# Altium PCB PCB_Byb2a.PcbDoc
Units mm, origin at the board's own origin, x right, y up, seen from the top; angles counter-clockwise.
Board outline 150 x 100.13 mm, 2 copper layers (Top Layer, Bottom Layer), stack 1.671 mm thick; 73 components, 29 nets, 138 pads, 21 vias.
Unrouted connection lines stored in the file: 5.
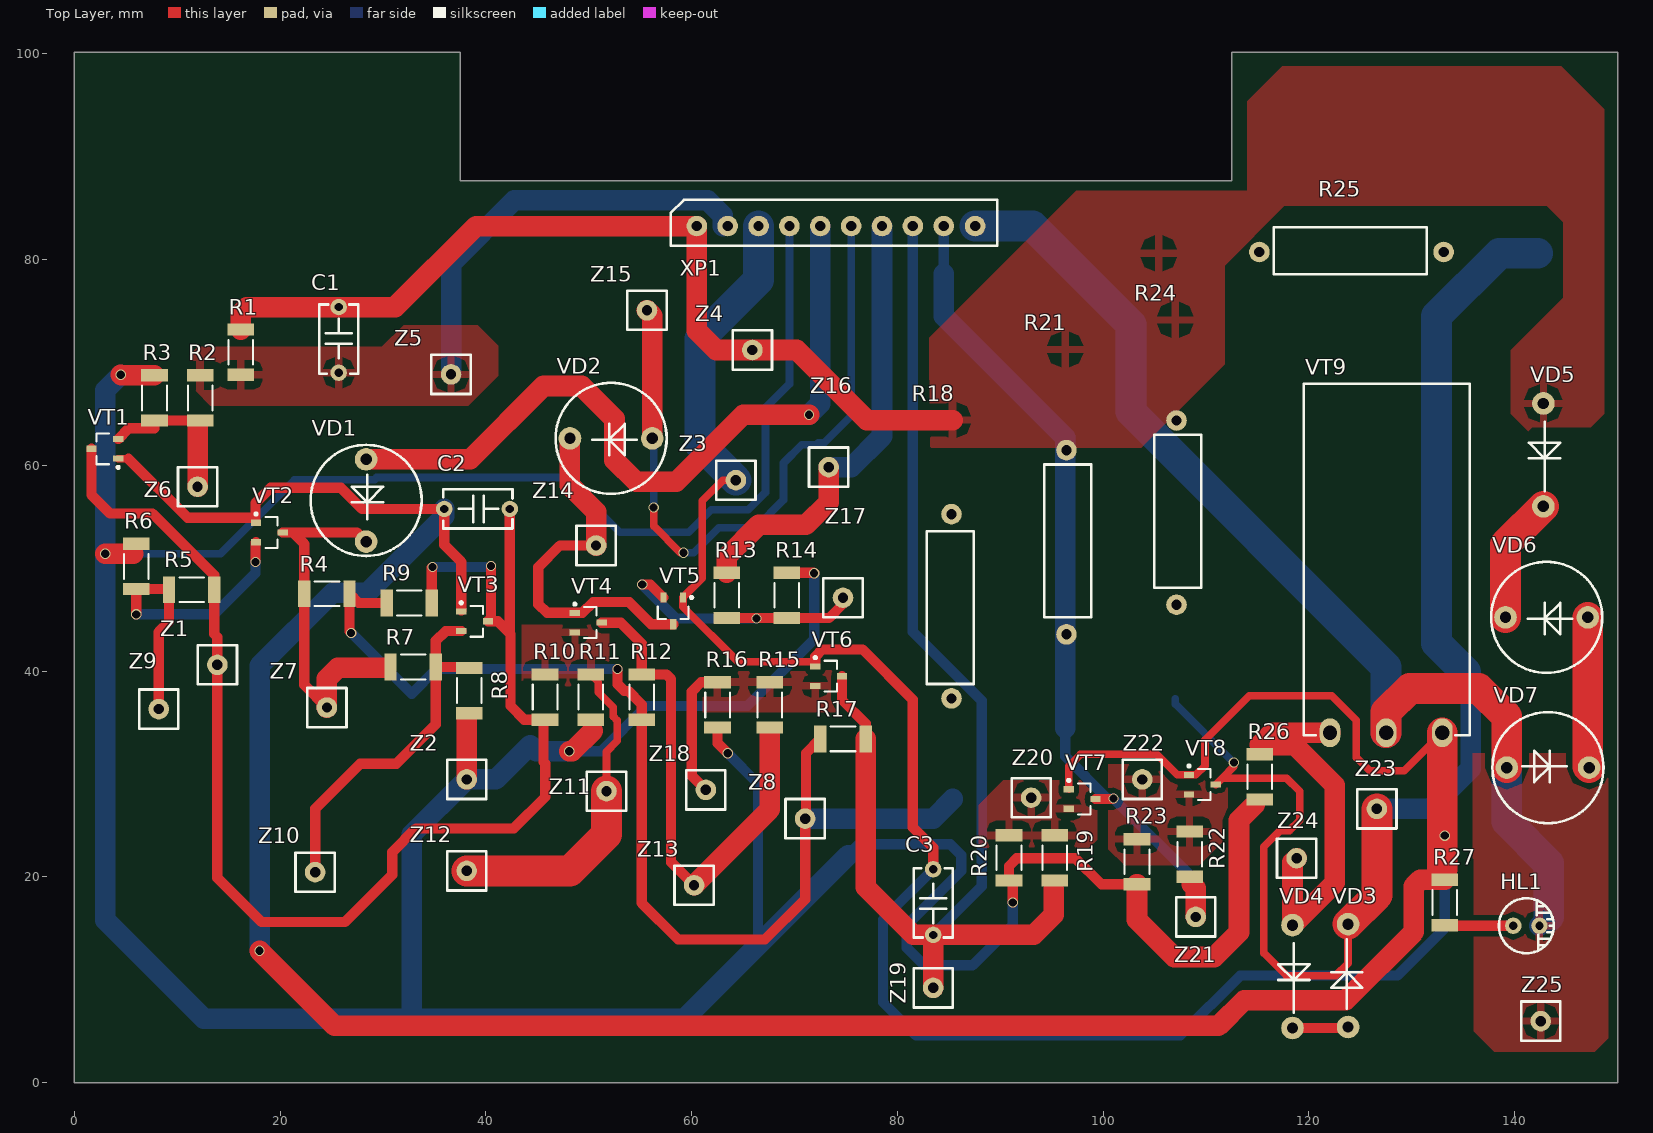
[diagram p0: Top Layer view]
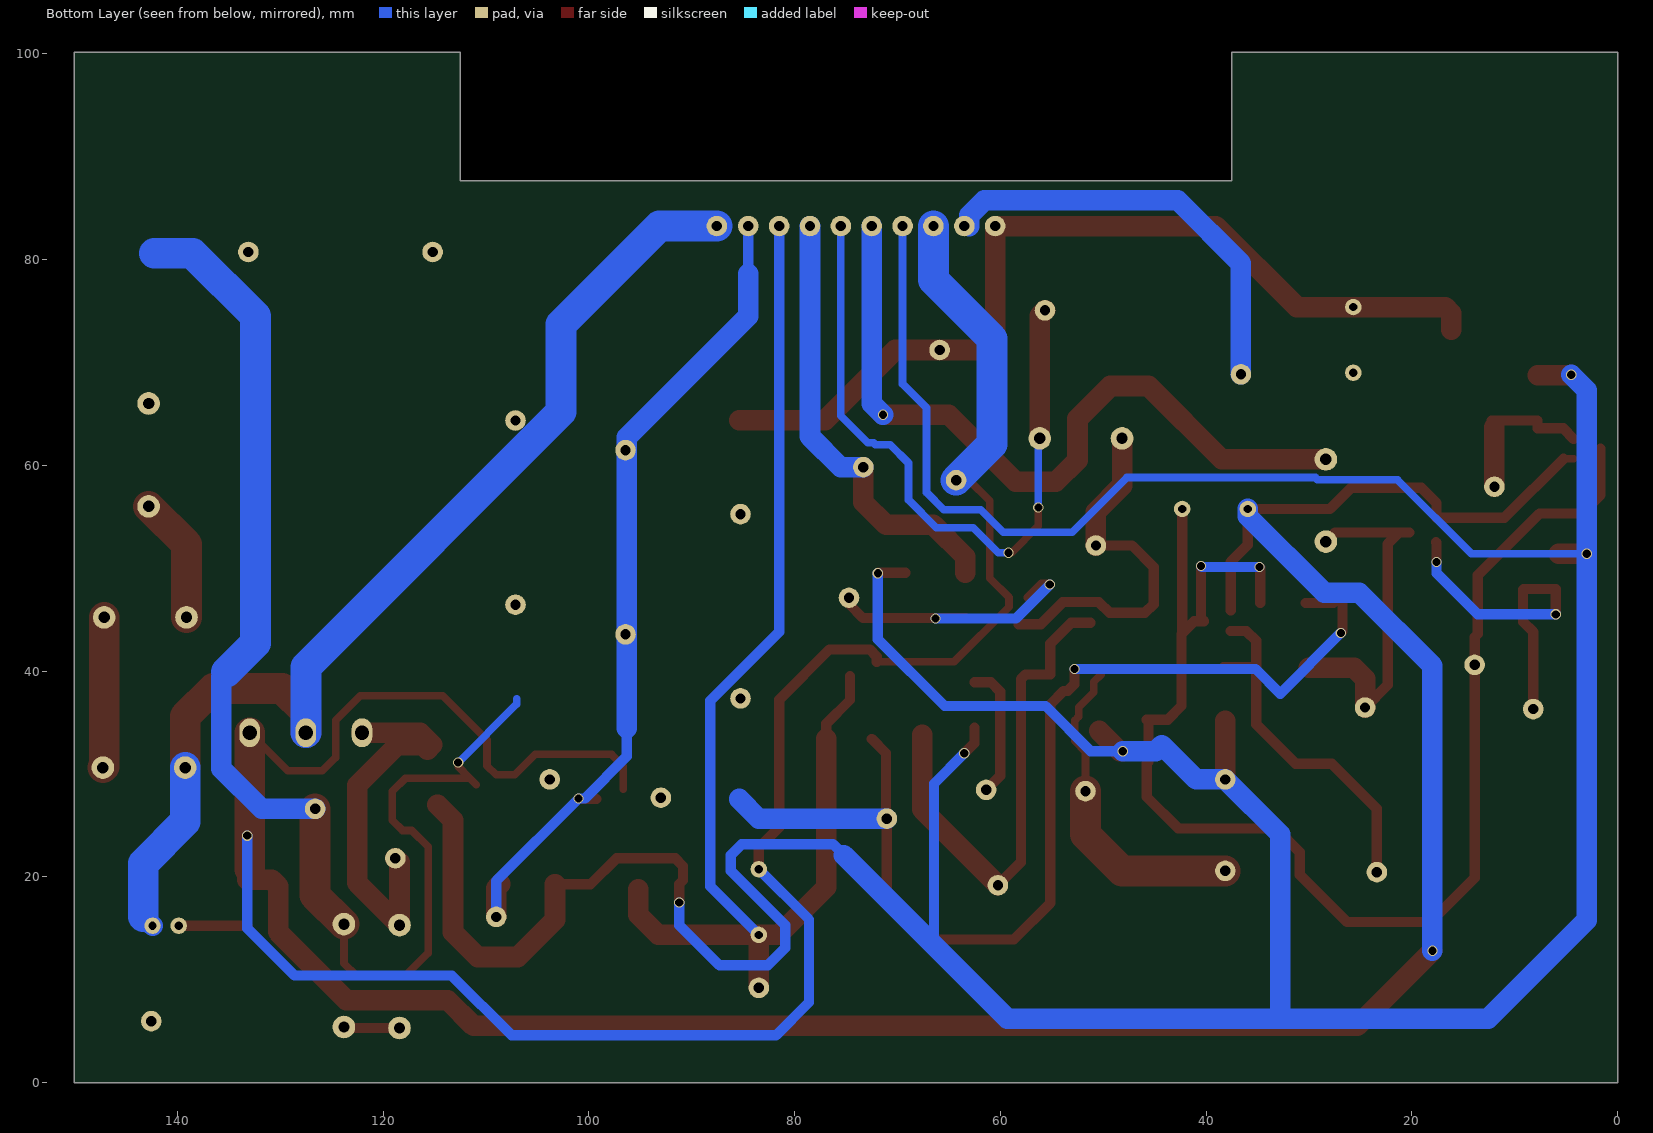
[diagram p1: Bottom Layer view, seen from below]
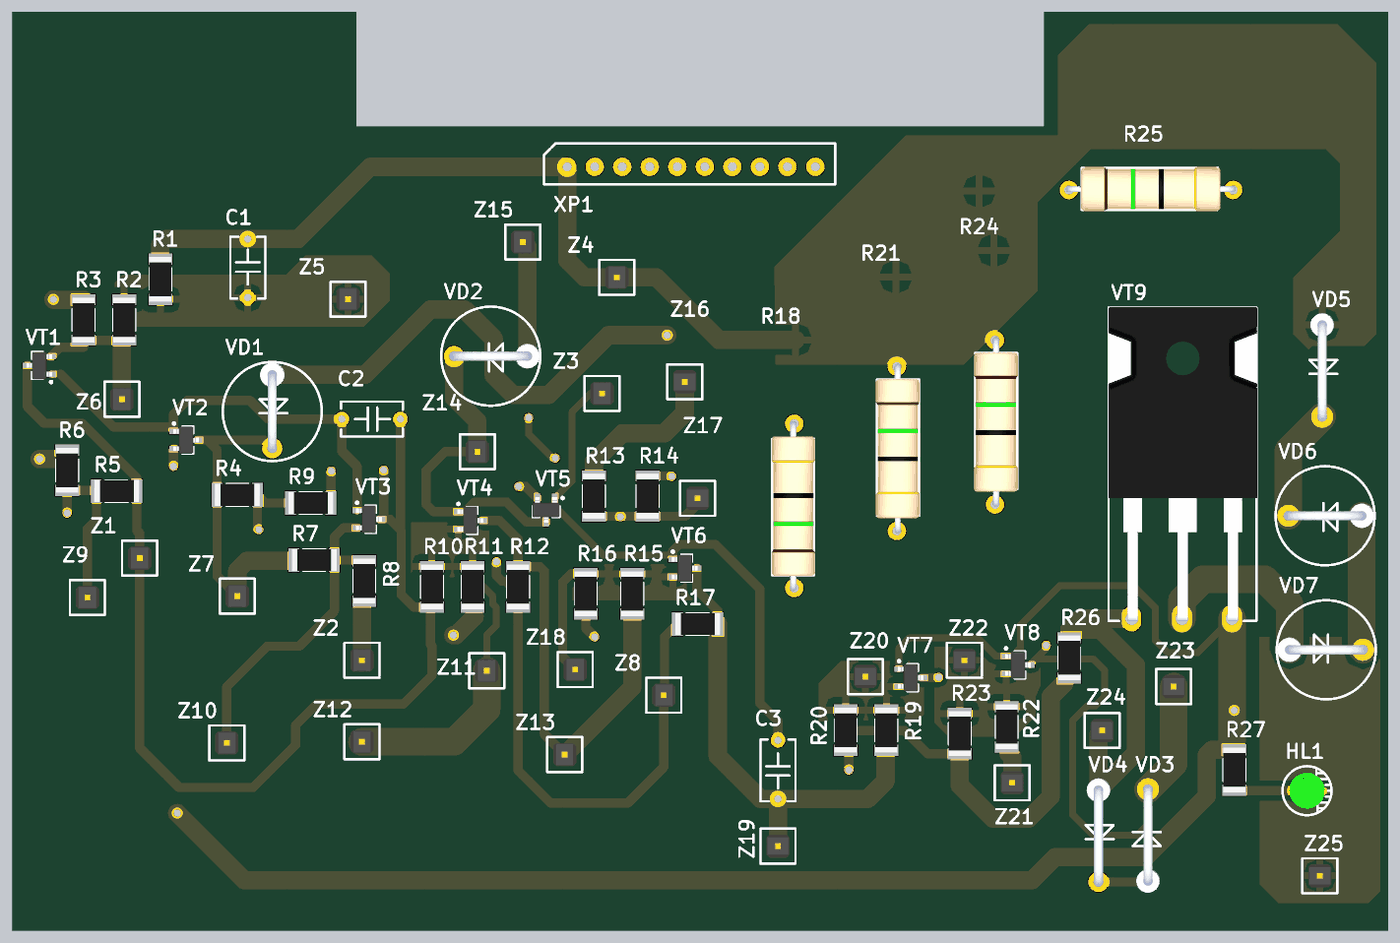
[diagram p2: 3D render of the assembled board from above, using the file's embedded part models]

## Layer stack, top to bottom
Top Solder: solder mask 0.0102, Solder Resist, Dk 3.5
Top Layer: signal copper 0.0356
Dielectric 1: dielectric 1.6, FR-4, Dk 4.8
Bottom Layer: signal copper 0.0356
Bottom Solder: solder mask 0.0102, Solder Resist, Dk 3.5

## Board outline
0,0 0,100.13 37.5,100.13 37.5,87.63 112.5,87.63 112.5,100.13 150,100.13 150,0

## Design rules (kind name [scope] priority, off if disabled: settings)
Clearance [All] p1: gap=0.5 ignorepadtopadclearanceinfootprint=FALSE except(1: Arc-Arc Arc-Track Track-Track)
PlaneClearance [All] p1: clearance=1
PlaneConnect [All] p1: planeconnectstyle=Relief reliefexpansion=0.75 reliefentries=4 reliefconductorwidth=0.75 reliefairgap=0.75
PolygonConnect [All] p1: connectstyle=Relief reliefconductorwidth=0.75 reliefentries=4 polygonreliefangle="90 Angle" airgapwidth=0.75
RoutingVias [All] p1: holewidth=0.8 width=1 viastyle="Through Hole" minholewidth=0.8 minwidth=1 maxholewidth=0.8 maxwidth=1
SolderMaskExpansion [All] p1: expansion=0.102
Width [All] p1: maxlimit=4 minlimit=0.75 preferedwidth=3
28 further rules are at their usual default settings.

## Components (designator, comment, footprint, x,y, rotation, side; value= is the part's Value field where it differs from the comment)
C1 "Capasitor" CAPASITOR 25.689,75.373 r270 top value=0.25uF
C2 "Capasitor" CAPASITOR 42.326,55.753 r180 top value=0.25uF
C3 "Capasitor" CAPASITOR 83.474,14.351 r90 top value=0.25uF
HL1 "Led" GNLR 139.862,15.24 r0 top
R1 "Resistor_1/2W" RESC5025L 16.164,70.993 r90 top value=470
R2 "Resistor_1/2W" RESC5025L 12.227,66.548 r90 top value=1k2
R3 "Resistor_1/2W" RESC5025L 7.782,66.548 r270 top value=680
R4 "Resistor_1/2W" RESC5025L 24.546,47.498 r0 top value=820
R5 "Resistor_1/2W" RESC5025L 11.4,47.9 r0 top value=820
R6 "Resistor_1/2W" RESC5025L 6.004,50.165 r270 top value=3k9
R7 "Resistor_1/2W" RESC5025L 32.928,40.386 r180 top value=820
R8 "Resistor_1/2W" RESC5025L 38.389,38.1 r90 top value=3k9
R9 "Resistor_1/2W" RESC5025L 32.547,46.609 r180 top value=820
R10 "Resistor_1/2W" RESC5025L 45.755,37.465 r270 top value=820
R11 "Resistor_1/2W" RESC5025L 50.2,37.465 r90 top value=3k9
R12 "Resistor_1/2W" RESC5025L 55.153,37.465 r270 top value=820
R13 "Resistor_1/2W" RESC5025L 63.408,47.355 r90 top value=820
R14 "Resistor_1/2W" RESC5025L 69.25,47.355 r270 top value=3k9
R15 "Resistor_1/2W" RESC5025L 67.599,36.703 r270 top value=820
R16 "Resistor_1/2W" RESC5025L 62.519,36.703 r90 top value=3k9
R17 "Resistor_1/2W" RESC5025L 74.711,33.401 r180 top value=820
R18 "Resistor_1/2W" RESISTOR_2W 85.379,64.389 r270 top value=220
R19 "Resistor_1/2W" RESC5025L 95.285,21.844 r270 top value=560
R20 "Resistor_1/2W" RESC5025L 90.84,21.844 r90 top value=3k3
R21 "Resistor_1/2W" RESISTOR_2W 96.301,34.417 r90 top value=560
R22 "Resistor_1/2W" RESC5025L 108.4,22.2 r270 top value=560
R23 "Resistor_1/2W" RESC5025L 103.286,21.463 r90 top value=3k3
R24 "Resistor_1/2W" RESISTOR_2W 107,37.3 r90 top value=560
R25 "Resistor_1/2W" RESISTOR_2W 142.23,80.6 r180 top value=560
R26 "Resistor_1/2W" RESC5025L 115.224,29.718 r90 top value=560
R27 "Resistor_1/2W" RESC5025L 133.2,17.5 r270 top value=3k3
VD1 "Diode" DO-41-VERTICAL 28.356,60.579 r270 top
VD2 "Diode" DO-41-VERTICAL 56.168,62.611 r180 top
VD3 "Diode" DO-15-VERTICAL 123.8,5.4 r90 top
VD4 "Diode" DO-15-VERTICAL 118.4,15.3 r270 top
VD5 "Diode" DO-15-VERTICAL 142.783,66.007 r270 top
VD6 "stabilizater" DO-41-VERTICAL 147.101,45.212 r180 top
VD7 "stabilizater" DO-41-VERTICAL 139.227,30.607 r0 top
VT1 "Bipolar Transistor" SOT95P270X110-3N 2.956,61.595 r180 top
VT2 "Bipolar Transistor" SOT95P270X110-3N 18.958,53.467 r0 top
VT3 "Bipolar Transistor" SOT95P270X110-3N 38.897,44.831 r0 top
VT4 "Bipolar Transistor" SOT95P270X110-3N 49.946,44.704 r0 top
VT5 "Bipolar Transistor" SOT95P270X110-3N 58.201,45.847 r270 top
VT6 "Bipolar Transistor" SOT95P270X110-3N 73.314,39.497 r0 top
VT7 "Bipolar Transistor" SOT95P270X110-3N 97.952,27.559 r0 top
VT8 "Bipolar Transistor" SOT95P270X110-3N 109.636,28.956 r0 top
VT9 "2sb688" TO-247-3 122.04,34 r0 top
XP1 "Connector" CONNECTOR 60.5,83.25 r0 top
Z1 "point_control" POINT_CONTROL 13.9,40.6 r0 top
Z2 "point_control" POINT_CONTROL 38.135,29.464 r0 top
Z3 "point_control" POINT_CONTROL 64.297,58.547 r0 top
Z4 "point_control" POINT_CONTROL 65.9,71.2 r0 top
Z5 "point_control" POINT_CONTROL 36.611,68.834 r0 top
Z6 "point_control" POINT_CONTROL 11.973,57.912 r180 top
Z7 "point_control" POINT_CONTROL 24.546,36.449 r0 top
Z8 "point_control" POINT_CONTROL 71.028,25.654 r0 top
Z9 "point_control" POINT_CONTROL 8.2,36.3 r0 top
Z10 "point_control" POINT_CONTROL 23.403,20.447 r0 top
Z11 "point_control" POINT_CONTROL 51.724,28.321 r0 top
Z12 "point_control" POINT_CONTROL 38.135,20.574 r0 top
Z13 "point_control" POINT_CONTROL 60.233,19.177 r0 top
Z14 "point_control" POINT_CONTROL 50.708,52.197 r180 top
Z15 "point_control" POINT_CONTROL 55.661,75.057 r0 top
Z16 "point_control" POINT_CONTROL 73.314,59.817 r90 top
Z17 "point_control" POINT_CONTROL 74.711,47.117 r90 top
Z18 "point_control" POINT_CONTROL 61.376,28.448 r0 top
Z19 "point_control" POINT_CONTROL 83.474,9.2 r90 top
Z20 "point_control" POINT_CONTROL 92.999,27.686 r90 top
Z21 "point_control" POINT_CONTROL 109,16.1 r90 top
Z22 "point_control" POINT_CONTROL 103.794,29.464 r90 top
Z23 "point_control" POINT_CONTROL 126.6,26.6 r90 top
Z24 "point_control" POINT_CONTROL 118.8,21.8 r90 top
Z25 "point_control" POINT_CONTROL 142.529,5.969 r90 top

## Footprints (in the part's own frame and the unit in brackets; to place one, negate y for a bottom-side part, rotate by r counter-clockwise, add the part's x,y. Pads: shape width x height; smd on the part's side, far side on the other; paste and mask are expansions set on the pad)
CAPASITOR [mm]
  round 1.6 hole 0.8: 1(0,0) 2(6.38,0)
  silkscreen extent -0.25,-1.91 6.48,1.91, body extent -0.32,-2.93 6.58,2.98, height 7.17
CONNECTOR [mm]
  round 2 hole 1: 1(0,0) 2(3,0) 3(6,0) 4(9,0) 5(12,0) 6(15,0) 7(18,0) 8(21,0) 9(24,0) 10(27.051,0)
  silkscreen extent -2.54,-1.91 29.21,2.54
DO-15-VERTICAL [mm]
  round 2.2 hole 1.1: 1(0,0) 2(10,0)
  silkscreen extent 1.78,-1.4 8.51,1.65, body extent -1.3,-1.3 10.5,1.3, height 8.38
DO-41-VERTICAL [mm]
  round 2.2 hole 1.1: 1(0,0) 2(8,0)
  silkscreen extent -1.4,-5.4 9.4,5.4, body extent -1.35,-1.35 8.5,1.35, height 12.1
GNLR [mm]
  round 1.6 hole 0.8: 1(0,0) 2(2.54,0)
  silkscreen extent -1.4,-2.67 3.94,2.67, body extent -0.68,-1.95 3.22,1.95, height 8
POINT_CONTROL [mm]
  round 2 hole 1: 1(0,0)
  silkscreen extent -1.91,-1.91 1.91,1.91, body extent -1.27,-1.27 1.27,1.27, height 10
RESC5025L [mm] "Chip Resistor, Body 5.0x2.5mm, IPC High Density"
  rect 1.2x2.6 smd: 1(-2.2,0) 2(2.2,0)
  silkscreen extent -1.2,-1.2 1.2,1.2, body extent -2.45,-1.2 2.45,1.2, height 0.55
RESISTOR_2W [mm]
  round 2 hole 1: 1(9.144,-0.127) 2(27.051,-0.127)
  silkscreen extent 10.79,-2.54 25.65,2.03, body extent 8.89,-2.62 27.38,2.16, height 5.02
SOT95P270X110-3N [mm] "SOT23, 3-Leads, Body 2,95x2,70mm, Pitch 0,95mm, IPC Medium Density"
  rect 1x0.6 smd: 1(-1.3,0.95) 2(-1.3,-0.95) 3(1.3,0)
  silkscreen extent -1.43,-1.5 0.8,1.92, body extent -1.4,-1.5 1.4,1.5, height 1.1
TO-247-3 [mm]
  oval 2x2.8 hole 1.4: 1(0,0) 2(5.46,0) 3(10.92,0)
  silkscreen extent -2.54,-0.25 13.59,33.91, body extent -2.54,-0.25 13.66,33.95, height 5.5

## Part data
C2 C3: Voltage=160B, Marka=ELM
HL1: Color=Green, Marka=АЛ-203
R1 R18 R21 R24 R25: package=5020, Power=2W
  R1: Marka=RES2010
  R18 R21 R24 R25: Marka=R2010
R2 R3: Power=0.5W
R4 R5 R6 R7 R8 R9 R10 R11 R12: package=2010, Power=0.5W
  R4: Marka=R5025
  R5 R7: Marka=R5020
  R6: Marka=RE5020
  R8 R9 R10 R11 R12: Marka=RES5020
R13 R14 R15 R16 R17 R19 R20 R22 R23 R26 R27: package=5020, Power=0.5W, Marka=R2010
VD1 VD2 VD6 VD7: package=DO-41
  VD1 VD2: Marka=HER105
  VD6 VD7: Marka=BZx85
VD3 VD4 VD5: package=DO-15, Marka=SF-28
VT1: package=SoT-323, Marka=2SB1198
VT2 VT3: package=SOT-323, Marka=2SB1198
VT4 VT6 VT7 VT8: package=Sot-323, Marka=2SB1198
VT5: package=sot-323, Marka=2SB1198
VT9: package=TO-247, Marka=2SB688
C1: Marka=EMN1223

## Via types
v1: diameter 1, hole 0.8, Top Layer to Bottom Layer, 21 vias

## Nets (pads, with @x,y where several pads share a name; then routed paths per layer and width w, separated by ;. In a path a pad name is that pad's centre, name@x,y a point inside that pad or via, vN(x,y) a via of type N, cw(c..) or ccw(c..) an arc to the next point about the centre after c; other vN are vias at no path point)
20: C2.2 C3.2 R27.1 VT1.1 VT2.1 VT3.1 VT5.1 VT6.1 VT7.1 VT8.1 VT9.3 XP1.3 Z3.1 | length 463.5
  Top Layer w0.75: VT1.1 5.255,60.645 ; Z3.1 63.047,58.547 61.033,56.533 61.033,49.029 VT5.1 59.151,46.249 64.5,40.9 72,40.9 ; VT7.1 96.652,30.752 97.8,31.9 105.212,31.9 107.206,29.906 VT8.1 109.006,29.906 109.9,30.8 109.9,33.3 114.2,37.6 122.2,37.6 124.6,35.2 124.6,31.6 125.9,30.3 129.26,30.3 VT9.3
  Top Layer w1: 5.255,60.645 11,54.9 17.6,54.9 17.6,56.3 19.1,57.8 25.9,57.8 27.947,55.753 C2.2 35.946,52.254 37.597,50.603 VT3.1@37.597,45.881 ; 72,40.9 72,41.4 72.7,42.1 76.6,42.1 81.5,37.2 81.5,24.8 83.474,22.826 C3.2
  Top Layer w2: v1(18,12.8) 25.3,5.5 111.2,5.5 113.7,8 123.559,8 130.2,14.641 130.2,19.1 130.8,19.7 R27.1
  Top Layer w3: 132.96,20.74 VT9.3
  Bottom Layer w1: C3.2 78.6,15.857 78.6,7.8 81.8,4.6 107.5,4.6 113.3,10.4 128.6,10.4 133.2,15 v1(133.2,24)
  Bottom Layer w2: v1(18,12.8) 18,40.5 25.1,47.6 28.5,47.6 35.946,55.046 C2.2
  Bottom Layer w3: Z3.1 60.8,62.044 60.8,72.3 66.5,78 XP1.3
29: C1.2 R1.1 R2.2 XP1.2 Z5.1 | length 41.4
  Bottom Layer w2: Z5.1 36.611,79.611 42.75,85.75 61.536,85.75 63,84.286 XP1.2@63,83.25
30: C1.1 R1.2 R18.1 R21.2 R24.2 R25.2 VD5.1 XP1.1 Z4.1 | length 88.1
  Top Layer w2: R1.2 16.164,74.764 16.773,75.373 C1.1 31.173,75.373 39.05,83.25 XP1.1 60.5,73.1 62.4,71.2 Z4.1 70.2,71.2 77.011,64.389 85.379,64.389
40: R4.2 R9.2 R12.2 R17.2 R18.2 Z8.1 | length 111.4
  Top Layer w1: v1(26.9,43.7) 26.746,43.854 R4.2 27.635,46.609 R9.2 ; v1(52.8,40.2) 52.8,38.704 53.439,38.065 53.835,38.065 55.153,36.747 R12.2 55.153,17.447 58.7,13.9 67.1,13.9 71.028,17.828 Z8.1 71.11,25.736 71.11,32 R17.2
  Bottom Layer w1: v1(26.9,43.7) 32.8,37.8 35.2,40.2 v1(52.8,40.2)
  Bottom Layer w2: Z8.1 83.474,25.654 85.379,27.559
45: R2.1 R3.2 VT1.2 Z6.1 | length 14.9
  Top Layer w1: VT1.2 5.293,63.582 7.782,63.582 R3.2 R2.1
  Top Layer w2: Z6.1 11.973,63.673
46: R5.1 R6.2 VT2.2 Z9.1 | length 34
  Top Layer w1: v1(6.004,45.504) R6.2 9.135,47.965 R5.1 9.2,44.8 8.2,43.8 Z9.1 ; v1(17.6,50.6) 17.6,52.459 VT2.2
  Bottom Layer w1: v1(6.004,45.504) 13.604,45.504 17.6,49.5 v1(17.6,50.6)
47: R4.1 R7.2 VD1.2 VT2.3 Z7.1 | length 35.5
  Top Layer w1: VT2.3 21.233,53.467 ; Z7.1 22.346,38.649 R4.1 22.346,52.354 21.233,53.467 ; VD1.2 27.468,53.467 21.233,53.467
  Top Layer w2: Z7.1 24.546,39.246 25.6,40.3 30,40.3
48: R7.1 R8.2 VT3.2 Z10.1 | length 35.5
  Top Layer w1: Z10.1 23.403,26.603 27.8,31 31.3,31 35.128,34.828 R7.1 ; VT3.2 36.081,43.881 35.128,42.928 R7.1 ; R8.2 38.303,40.386 R7.1
50: C2.1 R5.2 R9.1 R10.2 VT1.3 VT3.3 Z1.1 | length 137.2
  Top Layer w1: VT1.3 1.656,57.144 3.5,55.3 7.6,55.3 13.6,49.3 R5.2 13.6,43.6 13.9,43.3 Z1.1 13.9,19.9 18.2,15.6 26.3,15.6 30.9,20.2 30.9,22.4 33.2,24.7 42.7,24.7 45.755,27.755 45.755,31.009 45.6,31.164 45.6,35.11 R10.2 43.735,35.265 42.4,36.6 42.4,43.6 42.326,43.674 ; R9.1 34.747,50.047 v1(34.8,50.1) ; v1(40.5,50.2) 40.5,45.134 VT3.3 41.169,44.831 42.326,43.674 ; C2.1 42.326,43.674
  Bottom Layer w1: v1(34.8,50.1) 40.4,50.1 v1(40.5,50.2)
51: R10.1 R11.2 VT4.2 Z11.1 Z12.1 | length 32.1
  Top Layer w0.75: R11.2 50.925,38.94 50.925,37.927 52.375,36.477 52.375,35.584 52.775,35.184 52.775,33.216 51.724,32.165 Z11.1
  Top Layer w3: Z12.1 48.174,20.574 51.724,24.124 Z11.1
52: VD2.2 VT4.1 VT5.3 Z14.1 | length 36.3
  Top Layer w1: Z14.1 47.197,52.197 45.1,50.1 45.1,46.5 45.946,45.654 VT4.1 49.368,45.654 50.418,46.704 53.924,46.704 56.081,44.547 VT5.3
  Top Layer w2: VD2.2 48.168,58.032 50.708,55.492 Z14.1
53: R12.1 R15.2 VT4.3 Z13.1 | length 49.4
  Top Layer w1: VT4.3 53.096,44.704 55.153,42.647 R12.1 57.535,39.665 58,39.2 58,21.41 Z13.1
  Top Layer w2: Z13.1 67.6,26.544 67.6,33.8
56: R15.1 R16.2 VT6.2 Z18.1 | length 13
  Top Layer w1: Z18.1 60,29.824 60,38 60.903,38.903 R16.2
57: C3.1 R17.1 R19.2 VT6.3 XP1.8 Z19.1 | length 123.8
  Top Layer w1: VT6.3 74.614,37.186 76.911,34.889 R17.1
  Top Layer w2: R17.1 76.911,18.989 81.549,14.351 C3.1 ; Z19.1 C3.1 ; 95.2,18.8 95.2,16.3 93.251,14.351 C3.1
  Bottom Layer w1: XP1.8 81.5,43.8 88.2,37.1 88.2,19.077 C3.1
58: R19.1 R20.2 VT7.2 Z20.1
59: R21.1 R22.2 VT7.3 XP1.9 Z21.1 | length 82.8
  Top Layer w1: VT7.3 100.959,27.559 v1(101,27.6)
  Top Layer w2: 108.6,19.3 109,18.9 Z21.1
  Bottom Layer w1: 84.5,78.6 XP1.9 ; 96.301,34.417 96.301,31.699 100.4,27.6 v1(101,27.6) 109,19.6 Z21.1
  Bottom Layer w2: 84.5,78.6 84.5,74.5 96.301,62.699 96.301,34.417
60: R3.1 R6.1 R8.1 R11.1 R14.1 R16.1 R20.1 R23.1 R26.1 XP1.4 Z2.1 | length 430.7
  Top Layer w1: R16.1 62.519,32.981 v1(63.5,32) ; R14.1 71.845,49.555 v1(71.9,49.5) ; v1(91.2,17.5) 91.2,19.284 R20.1 90.84,21.04 91.6,21.8 97.3,21.8 99.837,19.263 R23.1
  Top Layer w2: v1(3,51.4) 5.7,51.4 ; v1(4.5,68.8) 4.552,68.748 R3.1 ; Z2.1 38.135,35.165 ; v1(48.1,32.2) 48.4,32.2 50.4,34.2 ; R23.1 103.286,15.814 106.9,12.2 110.8,12.2 113.2,14.6 113.2,25.494 R26.1@114.703,26.997
  Bottom Layer w0.75: v1(3,51.4) 14.2,51.4 21.404,58.604 29.174,58.604 29.37,58.8 47.7,58.8 53,53.5 59.725,53.5 61.897,55.672 65.488,55.672 67.172,57.356 67.172,65.572 69.5,67.9 XP1.4
  Bottom Layer w1: v1(48.1,32.2) 51.2,32.2 55.6,36.6 65.4,36.6 71.9,43.1 v1(71.9,49.5) ; v1(63.5,32) 66.45,29.05 66.45,13.35 ; 75.2,22.1 76.254,23.154 85.146,23.154 86.2,22.1 86.2,20.6 80.9,15.3 80.9,13.1 82.6,11.4 87.3,11.4 91.2,15.3 v1(91.2,17.5)
  Bottom Layer w2: v1(4.5,68.8) 3,67.3 v1(3,51.4) 3,15.8 12.6,6.2 33.1,6.2 ; v1(48.1,32.2) 44.9,32.2 44.3,32.8 40.964,29.464 Z2.1 32.8,24.129 32.8,6.5 33.1,6.2 ; 75.2,22.1 66.45,13.35 59.3,6.2 33.1,6.2
61: R22.1 R23.2 VT8.2 Z22.1
62: R24.1 R25.1 VD3.2 VT8.3 Z23.1 | length 131.4
  Top Layer w0.75: VT8.3 111.562,29.582 ; v1(112.7,31.1) 112.7,30.72 111.562,29.582 ; VD3.2 123.8,11.6 122.575,10.375 117.825,10.375 115.6,12.6 115.6,22.9 117.2,24.5 118.1,24.5 119.1,25.5 119.1,28.3 117.818,29.582 111.562,29.582
  Top Layer w3: VD3.2 126.6,18.2 Z23.1
  Bottom Layer w0.75: 107,37.3 107,36.8 v1(112.7,31.1)
  Bottom Layer w2: Z23.1 131.8,26.6 135.727,30.527 135.727,39.373 135.2,39.9
  Bottom Layer w3: 135.2,39.9 132.4,42.7 132.4,74.5 138.5,80.6 142.23,80.6
63: R26.2 VD4.1 VT9.1 Z24.1 | length 38.5
  Top Layer w2: Z24.1 118.4,21.4 VD4.1 122.5,19.4 122.5,28.9 118.603,32.797 116.103,32.797 115.677,32.371 115.224,32.824 116.4,34 VT9.1
65: HL1.2 VD7.1 VT9.2 XP1.10 Z25.1 | length 107.3
  Top Layer w3: VT9.2 127.5,36 129.8,38.3 136.5,38.3 139.227,35.573 VD7.1
  Bottom Layer w2: HL1.2 143.3,16.138
  Bottom Layer w3: XP1.10 93.15,83.25 102.7,73.7 102.7,65.2 127.5,40.4 VT9.2 ; VD7.1 139.227,25.373 143.3,21.3 143.3,16.138
NetHL1_1: HL1.1 R27.2 | length 6.7
  Top Layer w1: R27.2 133.26,15.24 HL1.1
NetR13_1: R13.1 R14.2 VT5.2 Z17.1 | length 27.5
  Top Layer w1: v1(55.2,48.4) 55.998,48.4 VT5.2 ; R13.1 R14.2 73.355,45.155 74.711,46.511 Z17.1
  Bottom Layer w1: v1(55.2,48.4) 58.5,45.1 v1(66.3,45.1)
NetVD3_1: VD3.1 VD4.2 | length 5.4
  Top Layer w1: VD4.2 123.7,5.3 VD3.1
NetVD5_2: VD5.2 VD6.2 | length 12.3
  Top Layer w3: VD6.2 139.101,52.325 VD5.2
NetVD6_1: VD6.1 VD7.2 | length 14.7
  Top Layer w3: VD6.1 147.101,30.733 VD7.2
x7/2a: VD1.1 XP1.5 | length 73.7
  Top Layer w2: VD1.1 38.479,60.579 45.6,67.7 49.3,67.7 52.5,64.5 52.5,60.5 54.6,58.4 58.5,58.4 65,64.9 v1(71.4,64.9)
  Bottom Layer w2: v1(71.4,64.9) 72.5,66 XP1.5
x7/3a: R13.2 XP1.7 Z16.1 | length 43.9
  Top Layer w2: R13.2 63.408,51.108 66.5,54.2 71.1,54.2 73.314,56.414 Z16.1
  Bottom Layer w2: Z16.1 75.517,59.817 78.5,62.8 XP1.7
x7/4a: VD2.1 XP1.6 Z15.1 | length 67.6
  Top Layer w0.75: v1(56.3,55.9) 56.3,54.1 58.9,51.5 v1(59.2,51.5)
  Top Layer w2: Z15.1 56.168,74.55 VD2.1
  Bottom Layer w0.75: VD2.1 56.3,62.479 v1(56.3,55.9) ; v1(59.2,51.5) 60.2,51.5 62.622,53.922 66.213,53.922 68.922,56.631 68.922,60.222 70.7,62 72.138,62 72.33,62.192 72.892,62.192 75.5,64.8 XP1.6

## Polygon pours and split planes (outlines as drawn)
61 on Top Layer "Top Overlay-No Net" (solid, remove dead copper, pour order 16): 100.5,31 100.5,22.7 102.1,21.1 109.3,21.1 112.1,23.9 112.1,29.7 110.8,31
56 on Top Layer "Top Overlay-No Net" (solid, remove dead copper, pour order 14): 59.5,40 59.5,36.3 59.8,36 74.1,36 76.3,38.2 76.3,40.1
51 on Top Layer "Top Overlay-No Net" (solid, remove dead copper, pour order 12): 43.5,44.5 43.5,39 44,38.5 51.5,38.5 52,39 52,43.7 51.2,44.5
65 on Top Layer "Top Overlay-No Net" (solid, remove dead copper, pour order 10): 135.9,32 135.9,21.8 136,21.7 136,5 138,3 147.8,3 149.1,4.3 149.1,32
58 on Top Layer "Top Overlay-No Net" (solid, remove dead copper, pour order 6): 87.9,22.8 98.6,22.8 99.4,23.6 99.4,27.8 97.8,29.4 90.3,29.4 87.9,27
29 on Top Layer "Top Overlay-No Net" (solid, remove dead copper, pour order 4): 11.2,70.7 11.2,67.8 13.2,65.8 38.3,65.8 41.2,68.7 41.2,71.6 39.2,73.6 32,73.6 29.9,71.5 12,71.5
30 on Top Layer "Top Overlay-No Net" (solid, remove dead copper, pour order 2): 83.2,61.8 83.3,61.7 103.7,61.7 111.8,69.8 111.8,79.4 117.6,85.2 143.1,85.2 144.7,83.6 144.7,76.3 139.6,71.2 139.6,65 141.3,63.3 141.7,63.7 147.4,63.7 148.7,65 148.7,94.6 144.5,98.8 117.4,98.8 114,95.4 114,86.7 97.4,86.7 83.1,72.4 83.1,70.5

## Silkscreen, mask and mechanical layers (free items; w line width, h text height)
Mechanical 1:
  lines w0.254: 0,0 0,100 37.5,100 37.5,87.63 112.5,87.63 112.5,100 150,100 150,0 0,0

## Dimensions
0,0 to 150,0 on Mechanical 1
150,0 to 150,100 on Mechanical 1